# Altium PCB Light.PcbDoc
Units mil, origin at the board's own origin, x right, y up, seen from the top; angles counter-clockwise.
Board outline 3575 x 1370 mil, 2 copper layers (Top Layer, Bottom Layer); 55 components, 29 nets, 164 pads, 0 vias.
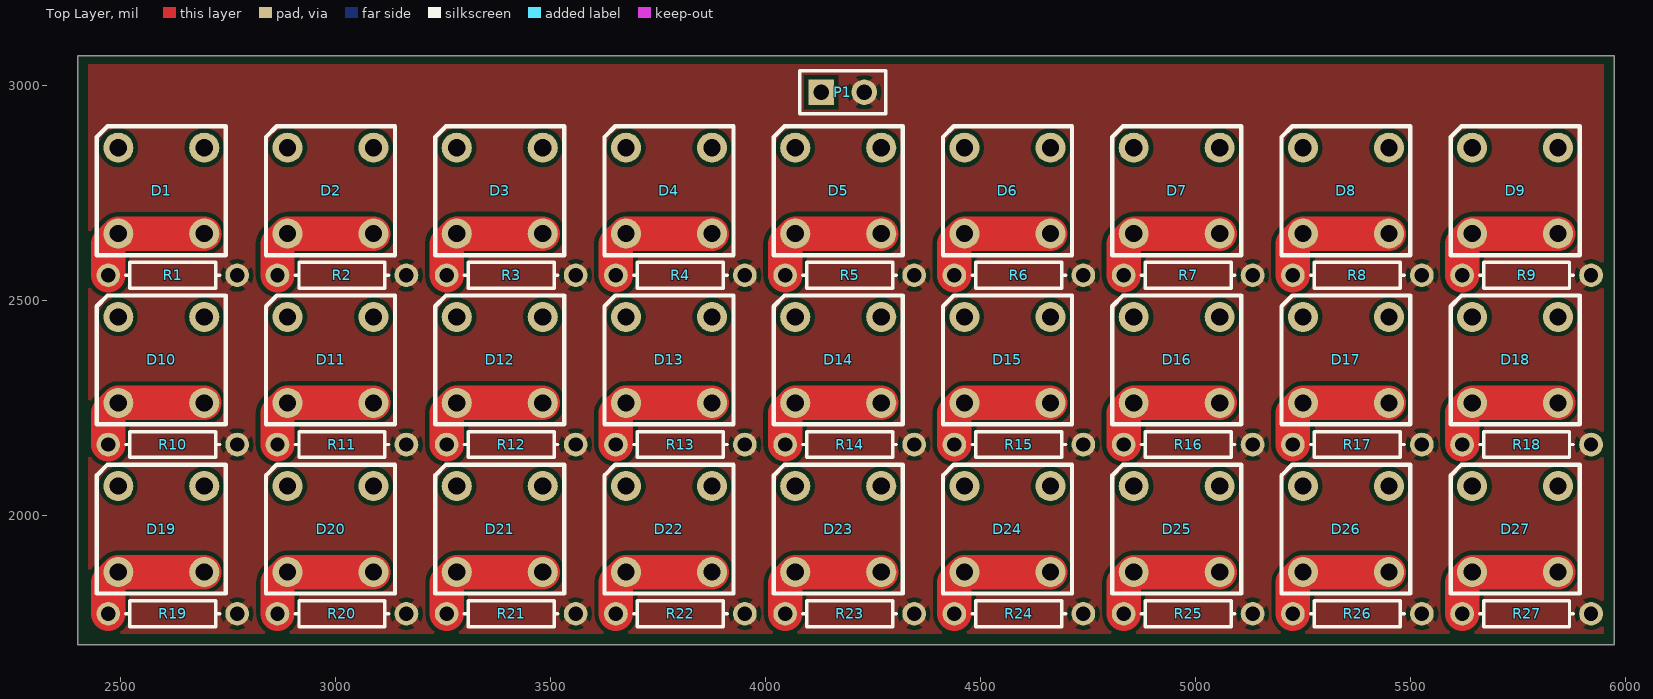
[diagram p0: Top Layer view]
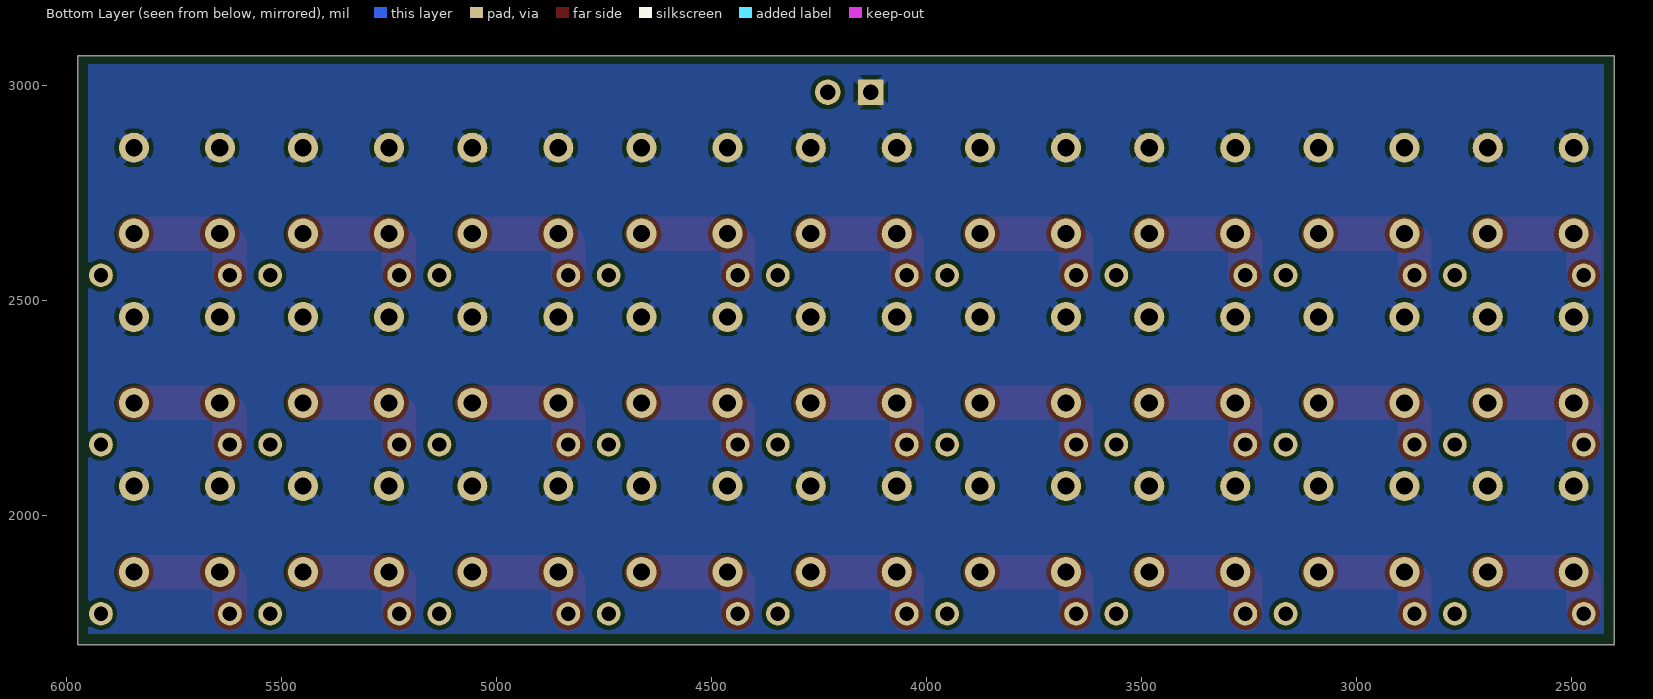
[diagram p1: Bottom Layer view, seen from below]

## Layer stack, top to bottom
Top Solder: solder mask 0.4, Solder Resist, Dk 3.5
Top Layer: signal copper 1.4
Dielectric 1: dielectric 12.6, FR-4, Dk 4.8
Bottom Layer: signal copper 1.4
Bottom Solder: solder mask 0.4, Solder Resist, Dk 3.5

## Board outline
2400,1700 2400,3070 5975,3070 5975,1700

## Design rules (kind name [scope] priority, off if disabled: settings)
Clearance [All] p1: gap=10 ignorepadtopadclearanceinfootprint=FALSE except(0: Arc-Hole Track-Hole SMDPad-Hole THPad-Hole Via-Hole Fill-Hole Poly-Hole Region-Hole Text-Hole)
PolygonConnect [All] p1: connectstyle=Relief reliefconductorwidth=20 reliefentries=4 polygonreliefangle="45 Angle" airgapwidth=10
RoutingVias [All] p1: holewidth=28 width=50 viastyle="Through Hole" minholewidth=28 minwidth=50 maxholewidth=28 maxwidth=50
SolderMaskExpansion [All] p1: expansion=4
Width [All] p1: maxlimit=80 minlimit=10 preferedwidth=40 minimp=50.000000 maximp=50.000000 favimp=50.000000
30 further rules are at their usual default settings.

## Components (designator, comment, footprint, x,y, rotation, side; value= is the part's Value field where it differs from the comment)
D1 "L-7676CSURC-E" L-7676CSURC-E 2594.61,2755.91 r90 top
D2 "L-7676CSURC-E" L-7676CSURC-E 2988.31,2755.91 r90 top
D3 "L-7676CSURC-E" L-7676CSURC-E 3382.01,2755.91 r90 top
D4 "L-7676CSURC-E" L-7676CSURC-E 3775.71,2755.91 r90 top
D5 "L-7676CSURC-E" L-7676CSURC-E 4169.41,2755.91 r90 top
D6 "L-7676CSURC-E" L-7676CSURC-E 4563.11,2755.91 r90 top
D7 "L-7676CSURC-E" L-7676CSURC-E 4956.81,2755.91 r90 top
D8 "L-7676CSURC-E" L-7676CSURC-E 5350.51,2755.91 r90 top
D9 "L-7676CSURC-E" L-7676CSURC-E 5744.21,2755.91 r90 top
D10 "L-7676CSURC-E" L-7676CSURC-E 2594.61,2362.2 r90 top
D11 "L-7676CSURC-E" L-7676CSURC-E 2988.31,2362.2 r90 top
D12 "L-7676CSURC-E" L-7676CSURC-E 3382.01,2362.2 r90 top
D13 "L-7676CSURC-E" L-7676CSURC-E 3775.71,2362.2 r90 top
D14 "L-7676CSURC-E" L-7676CSURC-E 4169.41,2362.2 r90 top
D15 "L-7676CSURC-E" L-7676CSURC-E 4563.11,2362.2 r90 top
D16 "L-7676CSURC-E" L-7676CSURC-E 4956.81,2362.2 r90 top
D17 "L-7676CSURC-E" L-7676CSURC-E 5350.51,2362.2 r90 top
D18 "L-7676CSURC-E" L-7676CSURC-E 5744.21,2362.2 r90 top
D19 "L-7676CSURC-E" L-7676CSURC-E 2594.61,1968.5 r90 top
D20 "L-7676CSURC-E" L-7676CSURC-E 2988.31,1968.5 r90 top
D21 "L-7676CSURC-E" L-7676CSURC-E 3382.01,1968.5 r90 top
D22 "L-7676CSURC-E" L-7676CSURC-E 3775.71,1968.5 r90 top
D23 "L-7676CSURC-E" L-7676CSURC-E 4169.41,1968.5 r90 top
D24 "L-7676CSURC-E" L-7676CSURC-E 4563.11,1968.5 r90 top
D25 "L-7676CSURC-E" L-7676CSURC-E 4956.81,1968.5 r90 top
D26 "L-7676CSURC-E" L-7676CSURC-E 5350.51,1968.5 r90 top
D27 "L-7676CSURC-E" L-7676CSURC-E 5744.21,1968.5 r90 top
P1 "Header 2" HDR1X2 4130,2985 r0 top
R1 "THRU_HOLE" AXIAL-0.3 2621.17,2559.06 r0 top value=470
R2 "THRU_HOLE" AXIAL-0.3 3014.87,2559.06 r0 top value=470
R3 "THRU_HOLE" AXIAL-0.3 3408.57,2559.06 r0 top value=470
R4 "THRU_HOLE" AXIAL-0.3 3802.27,2559.06 r0 top value=470
R5 "THRU_HOLE" AXIAL-0.3 4195.97,2559.06 r0 top value=470
R6 "THRU_HOLE" AXIAL-0.3 4589.67,2559.06 r0 top value=470
R7 "THRU_HOLE" AXIAL-0.3 4983.37,2559.06 r0 top value=470
R8 "THRU_HOLE" AXIAL-0.3 5377.07,2559.06 r0 top value=470
R9 "THRU_HOLE" AXIAL-0.3 5770.77,2559.06 r0 top value=470
R10 "THRU_HOLE" AXIAL-0.3 2621.17,2165.35 r0 top value=470
R11 "THRU_HOLE" AXIAL-0.3 3014.87,2165.35 r0 top value=470
R12 "THRU_HOLE" AXIAL-0.3 3408.57,2165.35 r0 top value=470
R13 "THRU_HOLE" AXIAL-0.3 3802.27,2165.35 r0 top value=470
R14 "THRU_HOLE" AXIAL-0.3 4195.97,2165.35 r0 top value=470
R15 "THRU_HOLE" AXIAL-0.3 4589.67,2165.35 r0 top value=470
R16 "THRU_HOLE" AXIAL-0.3 4983.37,2165.35 r0 top value=470
R17 "THRU_HOLE" AXIAL-0.3 5377.07,2165.35 r0 top value=470
R18 "THRU_HOLE" AXIAL-0.3 5770.77,2165.35 r0 top value=470
R19 "THRU_HOLE" AXIAL-0.3 2621.17,1771.65 r0 top value=470
R20 "THRU_HOLE" AXIAL-0.3 3014.87,1771.65 r0 top value=470
R21 "THRU_HOLE" AXIAL-0.3 3408.57,1771.65 r0 top value=470
R22 "THRU_HOLE" AXIAL-0.3 3802.27,1771.65 r0 top value=470
R23 "THRU_HOLE" AXIAL-0.3 4195.97,1771.65 r0 top value=470
R24 "THRU_HOLE" AXIAL-0.3 4589.67,1771.65 r0 top value=470
R25 "THRU_HOLE" AXIAL-0.3 4983.37,1771.65 r0 top value=470
R26 "THRU_HOLE" AXIAL-0.3 5377.07,1771.65 r0 top value=470
R27 "THRU_HOLE" AXIAL-0.3 5770.77,1771.65 r0 top value=470

## Footprints (in the part's own frame and the unit in brackets; to place one, negate y for a bottom-side part, rotate by r counter-clockwise, add the part's x,y. Pads: shape width x height; smd on the part's side, far side on the other; paste and mask are expansions set on the pad)
AXIAL-0.3 [mm] "Axial Device, Thru-Hole; 2 Leads; 0.3 in Pin Spacing"
  round 1.4 hole 0.85: 1(-3.81,0) 2(3.81,0)
  silkscreen extent -2.77,-0.76 2.77,0.76
HDR1X2 [mm] "Connector; Header; 2 Position"
  rect 1.5x1.5 hole 0.9: 1(0,0)
  round 1.5 hole 0.9: 2(2.54,0)
  silkscreen extent -1.27,-1.27 3.81,1.27
L-7676CSURC-E [mil]
  round 70 hole 40: 1(100,-100) 2(-100,-100) 3(100,100) 4(-100,100)
  silkscreen extent -150,-150 150,150, body extent -330,-195 150,150, height 319

## Part data
P1: "Header, 2-Pin", LatestRevisionDate=17-Jul-2002, LatestRevisionNote="Re-released for DXP Platform.", Publisher="Altium Limited"
R1 R2 R3 R4 R5 R6 R7 R8 R9 R10 R11 R12 R13 R14 R15 R16 R17 R18 R19 R20 R21 R22 R23 R24 R25 R26 R27: library part Res1, "Resistor", LatestRevisionDate=17-Jul-2002, LatestRevisionNote="Re-released for DXP Platform.", PackageDescription="Axial Device, Thru-Hole; 2 Leads; 0.3 in Pin Spacing", PackageReference=AXIAL-0.3, Published=8-Jun-2000, Publisher="Altium Limited"

## Nets (pads, with @x,y where several pads share a name; then routed paths per layer and width w, separated by ;. In a path a pad name is that pad's centre, name@x,y a point inside that pad or via, vN(x,y) a via of type N, cw(c..) or ccw(c..) an arc to the next point about the centre after c; other vN are vias at no path point)
+12: P1.2 R1.2 R2.2 R3.2 R4.2 R5.2 R6.2 R7.2 R8.2 R9.2 R10.2 R11.2 R12.2 R13.2 R14.2 R15.2 R16.2 R17.2 R18.2 R19.2 R20.2 R21.2 R22.2 R23.2 R24.2 R25.2 R26.2 R27.2
GND: D1.1 D1.3 D2.1 D2.3 D3.1 D3.3 D4.1 D4.3 D5.1 D5.3 D6.1 D6.3 D7.1 D7.3 D8.1 D8.3 D9.1 D9.3 D10.1 D10.3 D11.1 D11.3 D12.1 D12.3 D13.1 D13.3 D14.1 D14.3 D15.1 D15.3 D16.1 D16.3 D17.1 D17.3 D18.1 D18.3 D19.1 D19.3 D20.1 D20.3 D21.1 D21.3 D22.1 D22.3 D23.1 D23.3 D24.1 D24.3 D25.1 D25.3 D26.1 D26.3 D27.1 D27.3 P1.1
NetD1_2: D1.2 D1.4 R1.1 | length 306.6
  Top Layer w80: R1.1 2471.17,2632.46 D1.4 D1.2
NetD2_2: D2.2 D2.4 R2.1 | length 306.6
  Top Layer w80: R2.1 2864.87,2632.46 D2.4 D2.2
NetD3_2: D3.2 D3.4 R3.1 | length 306.6
  Top Layer w80: R3.1 3258.57,2632.46 D3.4 D3.2
NetD4_2: D4.2 D4.4 R4.1 | length 306.6
  Top Layer w80: R4.1 3652.27,2632.46 D4.4 D4.2
NetD5_2: D5.2 D5.4 R5.1 | length 306.6
  Top Layer w80: R5.1 4045.97,2632.46 D5.4 D5.2
NetD6_2: D6.2 D6.4 R6.1 | length 306.6
  Top Layer w80: R6.1 4439.67,2632.46 D6.4 D6.2
NetD7_2: D7.2 D7.4 R7.1 | length 306.6
  Top Layer w80: R7.1 4833.37,2632.46 D7.4 D7.2
NetD8_2: D8.2 D8.4 R8.1 | length 306.6
  Top Layer w80: R8.1 5227.07,2632.46 D8.4 D8.2
NetD9_2: D9.2 D9.4 R9.1 | length 306.6
  Top Layer w80: R9.1 5620.77,2632.46 D9.4 D9.2
NetD10_2: D10.2 D10.4 R10.1 | length 306.6
  Top Layer w80: R10.1 2471.17,2238.76 D10.4 D10.2
NetD11_2: D11.2 D11.4 R11.1 | length 306.6
  Top Layer w80: R11.1 2864.87,2238.76 D11.4 D11.2
NetD12_2: D12.2 D12.4 R12.1 | length 306.6
  Top Layer w80: R12.1 3258.57,2238.76 D12.4 D12.2
NetD13_2: D13.2 D13.4 R13.1 | length 306.6
  Top Layer w80: R13.1 3652.27,2238.76 D13.4 D13.2
NetD14_2: D14.2 D14.4 R14.1 | length 306.6
  Top Layer w80: R14.1 4045.97,2238.76 D14.4 D14.2
NetD15_2: D15.2 D15.4 R15.1 | length 306.6
  Top Layer w80: R15.1 4439.67,2238.76 D15.4 D15.2
NetD16_2: D16.2 D16.4 R16.1 | length 306.6
  Top Layer w80: R16.1 4833.37,2238.76 D16.4 D16.2
NetD17_2: D17.2 D17.4 R17.1 | length 306.6
  Top Layer w80: R17.1 5227.07,2238.76 D17.4 D17.2
NetD18_2: D18.2 D18.4 R18.1 | length 306.6
  Top Layer w80: R18.1 5620.77,2238.76 D18.4 D18.2
NetD19_2: D19.2 D19.4 R19.1 | length 306.6
  Top Layer w80: R19.1 2471.17,1845.06 D19.4 D19.2
NetD20_2: D20.2 D20.4 R20.1 | length 306.6
  Top Layer w80: R20.1 2864.87,1845.06 D20.4 D20.2
NetD21_2: D21.2 D21.4 R21.1 | length 306.6
  Top Layer w80: R21.1 3258.57,1845.06 D21.4 D21.2
NetD22_2: D22.2 D22.4 R22.1 | length 306.6
  Top Layer w80: R22.1 3652.27,1845.06 D22.4 D22.2
NetD23_2: D23.2 D23.4 R23.1 | length 306.6
  Top Layer w80: R23.1 4045.97,1845.06 D23.4 D23.2
NetD24_2: D24.2 D24.4 R24.1 | length 306.6
  Top Layer w80: R24.1 4439.67,1845.06 D24.4 D24.2
NetD25_2: D25.2 D25.4 R25.1 | length 306.6
  Top Layer w80: R25.1 4833.37,1845.06 D25.4 D25.2
NetD26_2: D26.2 D26.4 R26.1 | length 306.6
  Top Layer w80: R26.1 5227.07,1845.06 D26.4 D26.2
NetD27_2: D27.2 D27.4 R27.1 | length 306.6
  Top Layer w80: R27.1 5620.77,1845.06 D27.4 D27.2

## Polygon pours and split planes (outlines as drawn)
+12 on Top Layer (solid, pour order 0): 2425,1725 2425,3050 5950,3050 5950,1725
GND on Bottom Layer (solid, pour order 4): 2425,3050 5950,3050 5950,1725 2425,1725

## Silkscreen, mask and mechanical layers (free items; w line width, h text height)
BoardOutline:
  the board outline again, w10